# Altium PCB MIDI_Kontakter.PcbDoc
Units mm, origin at the board's own origin, x right, y up, seen from the top; angles counter-clockwise.
Board outline 50 x 24 mm, 2 copper layers (Top Layer, Bottom Layer); 3 components, 5 nets, 20 pads, 0 vias.
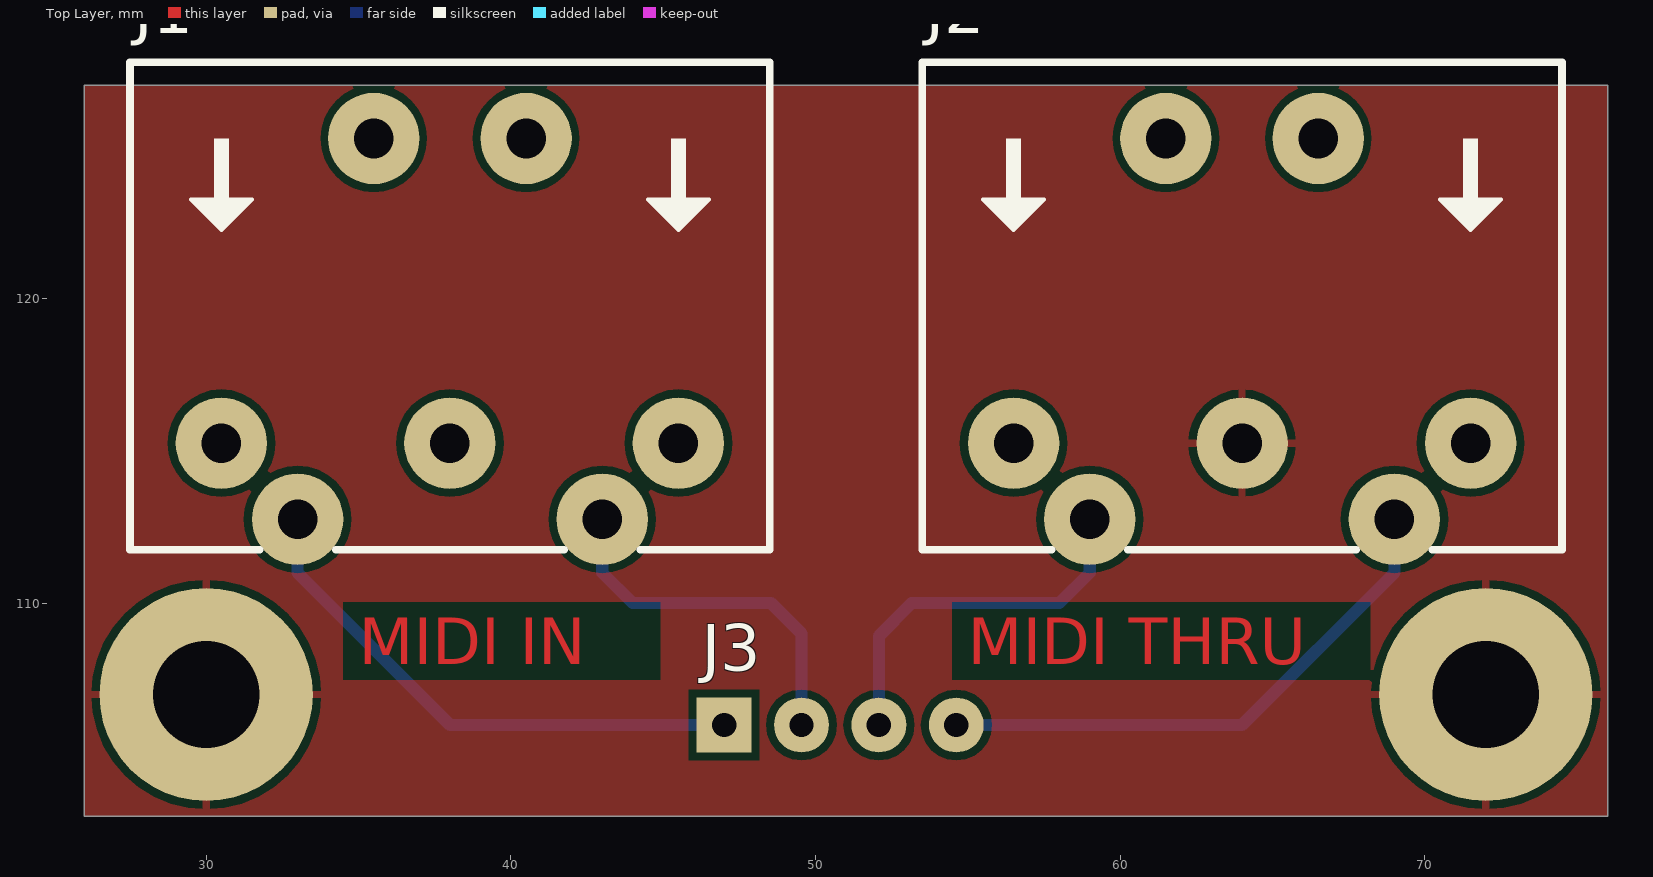
[diagram p0: Top Layer view]
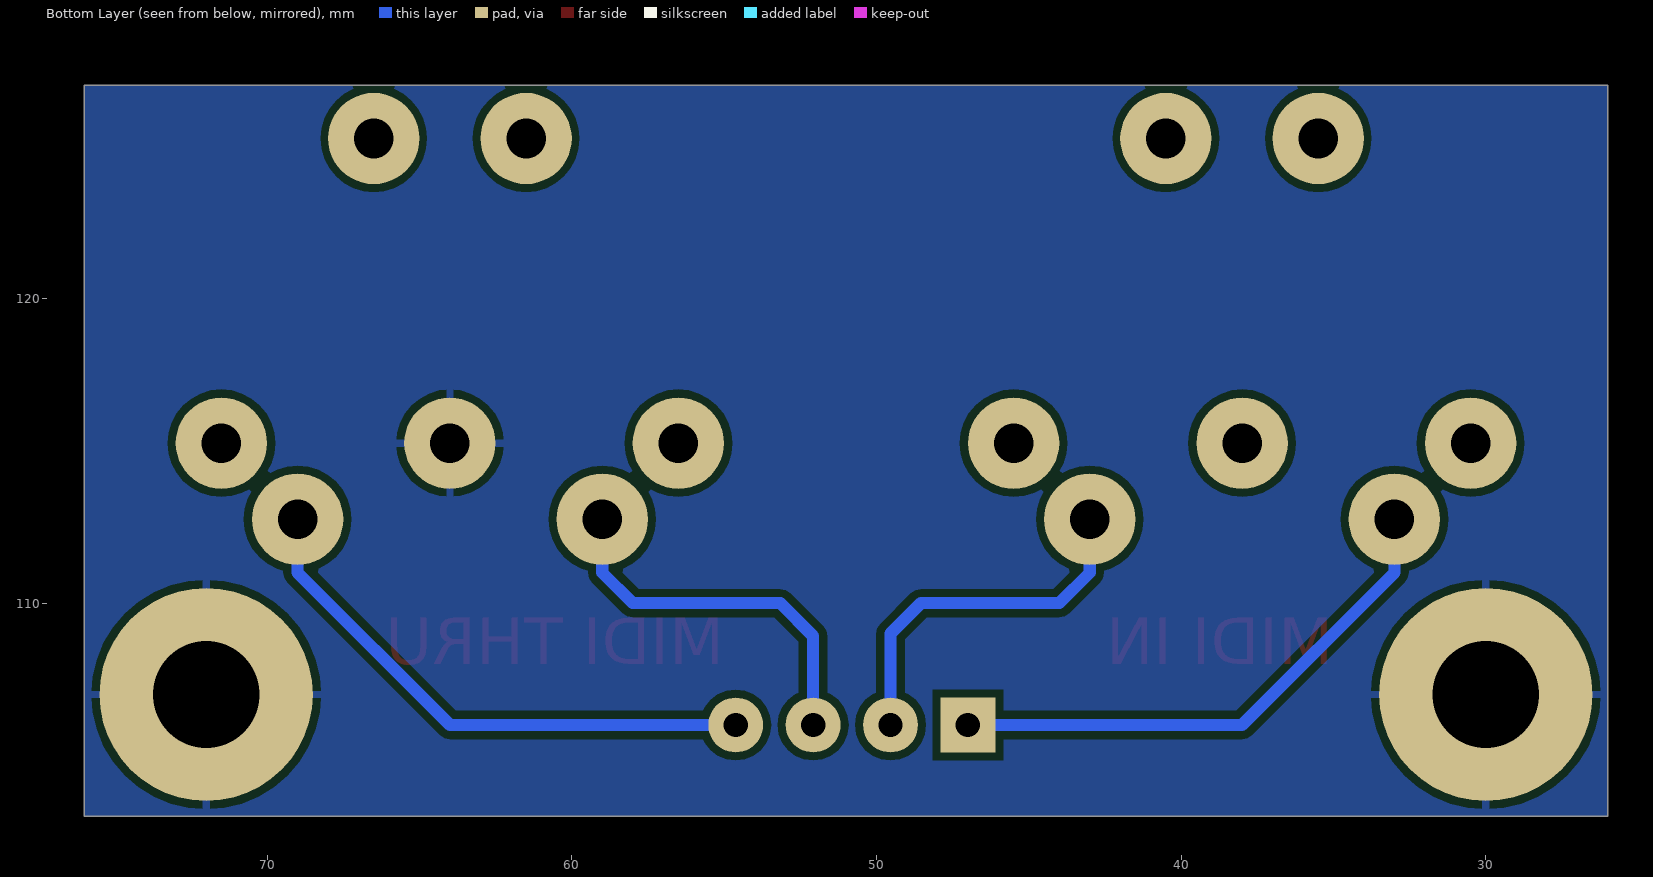
[diagram p1: Bottom Layer view, seen from below]

## Layer stack, top to bottom
Top Solder: solder mask 0.0102, Solder Resist, Dk 3.5
Top Layer: signal copper 0.0356
Dielectric1: dielectric 0.32, FR-4, Dk 4.8
Bottom Layer: signal copper 0.0356
Bottom Solder: solder mask 0.0102, Solder Resist, Dk 3.5

## Board outline
26,127 76,127 76,103 26,103 26,127

## Design rules (kind name [scope] priority, off if disabled: settings)
Clearance [All] p1: gap=0.254
PolygonConnect [All] p1: connectstyle=Relief reliefconductorwidth=0.254 reliefentries=4 polygonreliefangle="90 Angle" airgapwidth=0.254
RoutingVias [All] p1: holewidth=0.711 width=1.27 viastyle="Through Hole" minholewidth=0.711 minwidth=1.27 maxholewidth=0.711 maxwidth=1.27
SolderMaskExpansion [All] p1: expansion=0.102
UnpouredPolygon [All] p1: allowunpoured=FALSE
Width [All] p1: maxlimit=0.6 minlimit=0.4 preferedwidth=0.4
29 further rules are at their usual default settings.

## Components (designator, comment, footprint, x,y, rotation, side; value= is the part's Value field where it differs from the comment)
J1 "MIDI IN" KONV-KMFCDIN76005_V 38,119 r180 top
J2 "MIDI THRU" KONV-KMFCDIN76005_V 64,119 r180 top
J3 "Til PCB" "JST 4pin" 47,106 r270 top

## Footprints (in the part's own frame and the unit in brackets; to place one, negate y for a bottom-side part, rotate by r counter-clockwise, add the part's x,y. Pads: shape width x height; smd on the part's side, far side on the other; paste and mask are expansions set on the pad)
"JST 4pin" [mm]
  rect 1.8x1.8 hole 0.8: 1(0,0)
  round 1.8 hole 0.8: 2(0,2.54) 3(0,5.08) 4(0,7.62)
KONV-KMFCDIN76005_V [mm] "Socket, 5-way R/A DIN"
  round 3 hole 1.3: 1(7.5,3.75) 2(0,3.75) 3(-7.5,3.75) 4(5,6.25) 5(-5,6.25) MH1(2.5,-6.25) MH2(-2.5,-6.25)
  silkscreen extent -10.5,-8.75 10.5,7.25, body extent -10.34,-8.95 10.36,7.31, height 21.4

## Part data
J1 J2: library part CMP-0406-00001-1, "Socket, 5-way R/A DIN"
J3: library part "JST 4pin"

## Free pads (board coordinates)
  round 7 hole 3.5: 0(72,107) 1(30,107)

## Nets (pads, with @x,y where several pads share a name; then routed paths per layer and width w, separated by ;. In a path a pad name is that pad's centre, name@x,y a point inside that pad or via, vN(x,y) a via of type N, cw(c..) or ccw(c..) an arc to the next point about the centre after c; other vN are vias at no path point)
GND: J2.2 pad.0 pad.1
NetJ1_4: J1.4 J3.1 | length 17.8
  Bottom Layer w0.4: J1.4 33,111 38,106 J3.1
NetJ1_5: J1.5 J3.2 | length 12.1
  Bottom Layer w0.4: J1.5 43,111 44,110 48.54,110 49.54,109 J3.2
NetJ2_4: J2.4 J3.3 | length 12.5
  Bottom Layer w0.4: J3.3 52.08,108.92 53.16,110 58,110 59,111 J2.4
NetJ2_5: J2.5 J3.4 | length 18.2
  Bottom Layer w0.4: J3.4 64,106 69,111 J2.5
pads on no net: J1.1 J1.2 J1.3 J1.MH1 J1.MH2 J2.1 J2.3 J2.MH1 J2.MH2

## Polygon pours and split planes (outlines as drawn)
GND on Top Layer "Bottom Layer-No Net" (solid, pour order 2): 26,127 76,127 76,103 26,103 26,127
GND on Bottom Layer "Bottom Layer-No Net" (solid, pour order 4): 26,127 76,127 76,103 26,103 26,127

## Other copper
Top Layer:
  text "MIDI IN" at 35,108 h1.52
  text "MIDI THRU" at 55,108 h1.52